# Altium PCB TP_PCB.PcbDoc
Units mm, origin at the board's own origin, x right, y up, seen from the top; angles counter-clockwise.
Board outline 41 x 58.5 mm, 2 copper layers (Top Layer, Bottom Layer); 36 components, 22 nets, 142 pads, 26 vias.
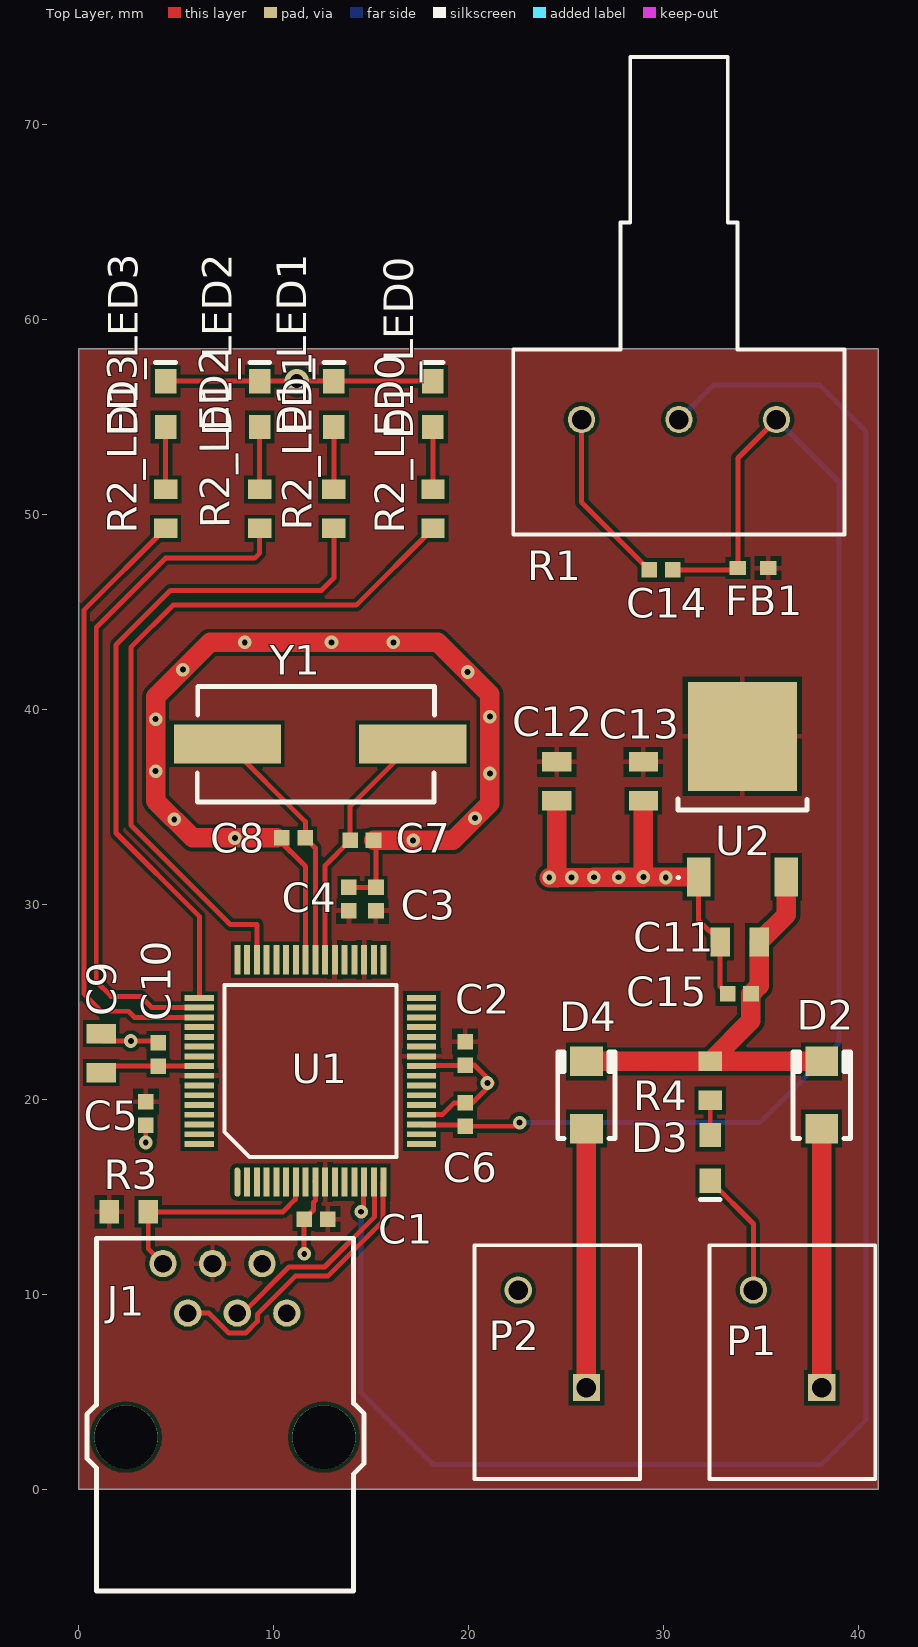
[diagram p0: Top Layer view]
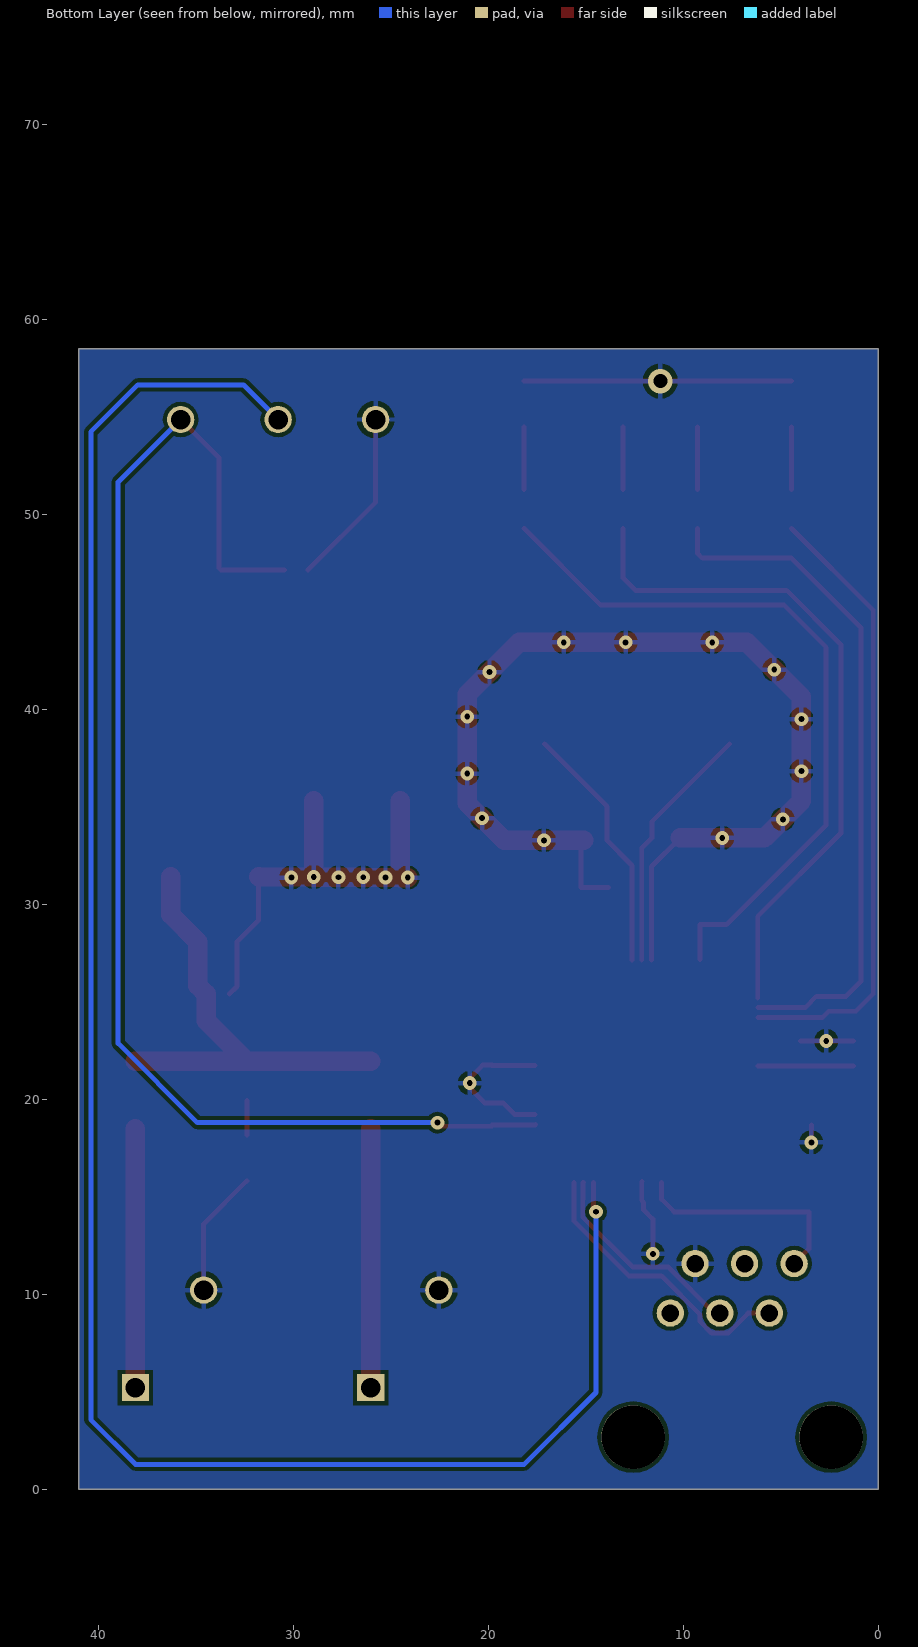
[diagram p1: Bottom Layer view, seen from below]

## Layer stack, top to bottom
Top Solder: solder mask 0.0102, Solder Resist, Dk 3.5
Top Layer: signal copper 0.0356
Dielectric 1: dielectric 0.32, FR-4, Dk 4.8
Bottom Layer: signal copper 0.0356
Bottom Solder: solder mask 0.0102, Solder Resist, Dk 3.5

## Board outline
0,0 41,0 41,58.5 0,58.5

## Design rules (kind name [scope] priority, off if disabled: settings)
Clearance [All] p1: gap=0.2
HoleSize [All] p1: absolutevalues=TRUE maxlimit=5 minlimit=0.3 maxpercent=80.000 minpercent=20.000
MinimumSolderMaskSliver [All] p1: minsoldermaskwidth=0.1
PolygonConnect [All] p1: connectstyle=Relief reliefconductorwidth=0.254 reliefentries=4 polygonreliefangle="90 Angle" airgapwidth=0.254
RoutingVias [All] p1: holewidth=0.3 width=0.7 viastyle="Through Hole" minholewidth=0.3 minwidth=0.7 maxholewidth=0.711 maxwidth=1
SilkToBoardRegionClearance SilkToBoardRegionClearance_1 [Not (InComponent('R1') OR InComponent('J1'))] p1:
SilkToBoardRegionClearance [All] p2 off:
SilkToSolderMaskClearance [IsPad] p1: minsilkscreentomaskgap=0.05 clearancetoexposedcopper=TRUE
SolderMaskExpansion [All] p1: expansion=0.102
UnpouredPolygon [All] p1: allowunpoured=FALSE
Width [All] p1: maxlimit=1 minlimit=0.2 preferedwidth=0.254 toplayer_prefwidth=0.2 bottomlayer_minwidth=0.254 bottomlayer_maxwidth=0.254 minimp=50.000000 maximp=50.000000 favimp=50.000000
25 further rules are at their usual default settings.

## Classes and differential pairs
component class LED0: D1_LED0 R2_LED0
component class LED1: D1_LED1 R2_LED1
component class LED2: D1_LED2 R2_LED2
component class LED3: D1_LED3 R2_LED3
component class PIC: C1 C2 C3 C4 C5 C6 C7 C8 C9 C10 J1 R3 U1 Y1
component class POWER: C11 C12 C13 C14 C15 D2 D3 D4 FB1 P1 P2 R4 U2
component class TP: R1
net class LED[0..3]: LED0 LED1 LED2 LED3
channel class led: LED0 LED1 LED2 LED3

## Components (designator, comment, footprint, x,y, rotation, side; value= is the part's Value field where it differs from the comment)
C1 "100nF" CAPC1608N 11.557,13.843 r0 top
C2 "100nF" CAPC1608N 19.812,21.748 r90 top
C3 "100nF" CAPC1608N 15.24,30.861 r270 top
C4 "100nF" CAPC1608N 13.843,30.861 r270 top
C5 "100nF" CAPC1608N 3.429,18.669 r90 top
C6 "100nF" CAPC1608N 19.812,19.812 r270 top
C7 "20pF" CAPC1608N 15.113,33.274 r180 top
C8 "20pF" CAPC1608N 10.414,33.401 r0 top
C9 "10uF" CAPC2012N 1.143,23.368 r270 top
C10 "1uF" CAPC1608N 4.064,22.898 r270 top
C11 "10uF" CAPC2012N 32.893,28.067 r0 top
C12 "10uF" CAPC2012N 24.511,35.306 r90 top
C13 "1uF" CAPC2012N 28.956,35.306 r90 top
C14 "100nF" CAPC1608N 29.254,47.148 r0 top
C15 "10uF" CAPC1608N 33.274,25.4 r0 top
D1_LED0 "Green LED" "LED 0805" 18.161,54.483 r90 top (schematic designator D1)
D1_LED1 "Green LED" "LED 0805" 13.081,54.483 r90 top (schematic designator D1)
D1_LED2 "Green LED" "LED 0805" 9.271,54.483 r90 top (schematic designator D1)
D1_LED3 "Green LED" "LED 0805" 4.445,54.483 r90 top (schematic designator D1)
D2 "GF1A" SMA/DO-214AC_21 38.1,18.489 r90 top
D3 "Green LED" "LED 0805" 32.385,18.161 r270 top
D4 "GF1A" SMA/DO-214AC_21 26.035,18.489 r90 top
FB1 "600r" INDC1608AN 35.35,47.244 r180 top
J1 "Program / Debug" RJ12_90 2.413,2.667 r0 top
P1 "12V Main" PHOENIX_1985195 34.6,5.207 r0 top
P2 "12V Battery" PHOENIX_1985195 22.535,5.207 r0 top
R1 "1K" PDB181-K415K-102A2 25.781,54.864 r0 top (schematic designator R2)
R2_LED0 "330r" RESC1608N 18.161,49.276 r90 top (schematic designator R2)
R2_LED1 "330r" RESC1608N 13.081,49.276 r90 top (schematic designator R2)
R2_LED2 "330r" RESC1608N 9.271,49.276 r90 top (schematic designator R2)
R2_LED3 "330r" RESC1608N 4.445,49.276 r90 top (schematic designator R2)
R3 "4.7K" RESC1608N 3.556,14.224 r180 top
R4 "470r" RESC1608N 32.385,19.939 r90 top
U1 "PIC32MX764F128H-I/PT" QFP50P1200X1200X120-64 8.128,15.748 r90 top
U2 "AP1117" TD03B_N 34.036,38.608 r0 top
Y1 "8MHz" "HC49/4H SMX CRYSTAL" 7.62,38.227 r0 top

## Footprints (in the part's own frame and the unit in brackets; to place one, negate y for a bottom-side part, rotate by r counter-clockwise, add the part's x,y. Pads: shape width x height; smd on the part's side, far side on the other; paste and mask are expansions set on the pad)
CAPC1608N [mm]
  rect 0.8x0.8 smd: 1(0,0) 2(1.2,0)
CAPC2012N [mm]
  rect 1x1.5 smd: 1(0,0) 2(2,0)
"HC49/4H SMX CRYSTAL" [mm]
  rect 5.5x2 smd: 1(0,0) 2(9.5,0)
  silkscreen extent -1.55,-2.97 10.62,2.95
INDC1608AN [mm]
  rect 0.85x0.7 smd: 1(0,0) 2(1.545,0)
"LED 0805" [mm]
  rect 1.25x1.1 smd: 1(0,0) 2(2.35,0)
  silkscreen extent 3.3,-0.51 3.3,0.51
PDB181-K415K-102A2 [mm]
  round 1.4 hole 1: 1(10,0) 2(0,0) 3(5,0)
  silkscreen extent -3.5,-5.9 13.5,18.6
PHOENIX_1985195 [mm]
  rect 1.4x1.4 hole 1: 1(3.5,0)
  round 1.4 hole 1: 2(0,5)
  silkscreen extent -2.25,-4.7 6.25,7.3
QFP50P1200X1200X120-64 [mm]
  oval 1.5x0.3 smd: 1(0,0)
  rect 1.5x0.3 smd: 2(0,-0.5) 3(0,-1) 4(0,-1.5) 5(0,-2) 6(0,-2.5) 7(0,-3) 8(0,-3.5) 9(0,-4) 10(0,-4.5) 11(0,-5) 12(0,-5.5) 13(0,-6) 14(0,-6.5) 15(0,-7) 16(0,-7.5) 33(11.4,-7.5) 34(11.4,-7) 35(11.4,-6.5) 36(11.4,-6) 37(11.4,-5.5) 38(11.4,-5) 39(11.4,-4.5) 40(11.4,-4) 41(11.4,-3.5) 42(11.4,-3) 43(11.4,-2.5) 44(11.4,-2) 45(11.4,-1.5) 46(11.4,-1) 47(11.4,-0.5) 48(11.4,0)
  rect 0.3x1.5 smd: 17(1.95,-9.45) 18(2.45,-9.45) 19(2.95,-9.45) 20(3.45,-9.45) 21(3.95,-9.45) 22(4.45,-9.45) 23(4.95,-9.45) 24(5.45,-9.45) 25(5.95,-9.45) 26(6.45,-9.45) 27(6.95,-9.45) 28(7.45,-9.45) 29(7.95,-9.45) 30(8.45,-9.45) 31(8.95,-9.45) 32(9.45,-9.45) 49(9.45,1.95) 50(8.95,1.95) 51(8.45,1.95) 52(7.95,1.95) 53(7.45,1.95) 54(6.95,1.95) 55(6.45,1.95) 56(5.95,1.95) 57(5.45,1.95) 58(4.95,1.95) 59(4.45,1.95) 60(3.95,1.95) 61(3.45,1.95) 62(2.95,1.95) 63(2.45,1.95) 64(1.95,1.95)
  silkscreen extent 1.28,-8.16 10.11,0.67
RESC1608N [mm]
  rect 1x1.2 smd: 1(0,0) 2(2,0)
RJ12_90 [mm]
  round 1.4 hole 0.9: 1(1.9,8.9) 2(4.44,8.9) 3(6.98,8.9) 4(3.17,6.36) 5(5.71,6.36) 6(8.25,6.36)
  round 3.25 hole 3.25 unplated: ""(0,0) ""(10.16,0)
  silkscreen extent -2.01,-7.9 12.22,10.2
SMA/DO-214AC_21 [mm]
  rect 1.52x1.68 smd: 1(0,0) 2(3.45,0)
  silkscreen extent -0.51,-1.47 3.94,1.47
TD03B_N [mm]
  rect 1.2x2 smd: 1(-2.25,-7.2) 3(2.25,-7.2)
  rect 5.6x5.6 smd: 4(0,0)
  silkscreen extent -3.3,-7.24 3.3,-3.2

## Part data
C1 C2 C3 C4 C5 C6 C7 C8 C9 C10 C11 C12 C13 C14 C15: library part Cap, "Capacitor"
D1_LED0 D1_LED1 D1_LED2 D1_LED3 D3: library part LED0, "Typical INFRARED GaAs LED"
D2 D4: library part Diode, "Default Diode"
FB1: library part Inductor, "Inductor"
J1: library part "Header 6", "Header, 6-Pin"
P1 P2: library part "Header 2", "Header, 2-Pin"
R1: library part RPot, "Potentiometer"
R2_LED0 R2_LED1 R2_LED2 R2_LED3 R3 R4: library part Res1, "Resistor"
U1: library part PIC32
Y1: library part XTAL, "Crystal Oscillator"

## Via types
v1: diameter 0.7, hole 0.3, Top Layer to Bottom Layer, 25 vias
v2: diameter 1.27, hole 0.711, Top Layer to Bottom Layer, 1 vias

## Nets (pads, with @x,y where several pads share a name; then routed paths per layer and width w, separated by ;. In a path a pad name is that pad's centre, name@x,y a point inside that pad or via, vN(x,y) a via of type N, cw(c..) or ccw(c..) an arc to the next point about the centre after c; other vN are vias at no path point)
ALIM: D2.1 P1.1 | length 13.3
  Top Layer w1: P1.1 D2.1
BATTERY: D4.1 P2.1 | length 13.3
  Top Layer w1: P2.1 D4.1
GND: C1.1 C2.1 C3.1 C4.1 C5.1 C6.1 C7.1 C8.1 C9.1 C10.1 C11.1 C12.1 C13.1 C14.1 C15.1 D1_LED0.2 D1_LED1.2 D1_LED2.2 D1_LED3.2 D3.2 J1.3 P1.2 P2.2 R1.2 U1.9 U1.20 U1.25 U1.41 U2.1 | length 126.8
  Top Layer w0.254: C9.1@1.27,22.987 v1(2.667,22.987) C10.1@3.975,22.987 ; v1(3.429,17.78) C5.1 ; D1_LED3.2 D1_LED2.2 D1_LED1.2 D1_LED0.2 ; C8.1@10.16,33.401 11.628,31.933 U1.41 ; v1(11.557,12.065) C1.1 12.03,14.316 12.03,14.697 12.128,14.795 U1.9 U1.9@12.105,15.771 ; C4.1 C3.1 C7.1@15.24,33.147 ; U1.20@17.601,19.221 18.655,19.221 19.246,19.812 C6.1 20.193,19.812 21.209,20.828 20.289,21.748 C2.1 19.812,21.721 U1.25@17.601,21.721 ; v1(24.13,31.369) 26.416,31.386 27.686,31.395 28.957,31.404 29.464,31.408 ; R1.2 25.781,50.621 C14.1 ; U2.1 31.786,29.174 C11.1 32.893,25.781 C15.1 ; D3.2 34.6,13.596 P1.2
  Top Layer w1: C8.1@10.16,33.401 v1(8.001,33.401) 5.842,33.401 3.937,35.306 3.937,40.64 6.731,43.434 18.415,43.434 21.082,40.767 21.082,35.179 19.177,33.274 v1(17.145,33.274) C7.1 ; v1(24.13,31.369) 24.513,31.371 v1(26.416,31.381) v1(27.686,31.387) v1(28.957,31.394) U2.1 ; 24.511,31.75 C12.1 ; v1@28.956,31.53 C13.1
  other v1: 20.955,20.828 25.273,31.369 30.099,31.369 4.889,34.353 20.32,34.417 21.082,36.703 3.937,36.83 3.937,39.497 21.082,39.624 19.939,41.91 5.334,42.037 8.509,43.434 12.954,43.434 16.129,43.434
  other v2: 11.176,56.833
LED0: R2_LED0.1 U1.46 | length 37.5
  Top Layer w0.254: U1.46@9.144,27.164 9.144,28.956 7.778,28.956 2.667,34.067 2.667,43.18 4.826,45.339 14.224,45.339 R2_LED0.1
LED1: R2_LED1.1 U1.49 | length 35
  Top Layer w0.254: U1.49 6.178,29.382 1.905,33.655 1.905,43.307 4.699,46.101 12.446,46.101 13.081,46.736 R2_LED1.1
LED2: R2_LED2.1 U1.50 | length 35.2
  Top Layer w0.254: U1.50 3.75,24.698 3.175,25.273 1.651,25.273 0.889,26.035 0.889,44.196 4.445,47.752 9.017,47.752 9.271,48.006 R2_LED2.1
LED3: R2_LED3.1 U1.51 | length 32
  Top Layer w0.254: R2_LED3.1 0.254,45.085 0.254,25.4 1.143,24.511 2.54,24.511 2.853,24.198 U1.51
MCLR: J1.1 R3.1 U1.7 | length 11.6
  Top Layer w0.254: J1.1 3.556,12.324 R3.1 10.466,14.224 11.105,14.863 U1.7@11.105,15.725
NetC9_2: C9.2 C10.2 U1.56 | length 4.9
  Top Layer w0.254: C9.2@1.27,21.698 C10.2 U1.56
NetD1_LED0_1: D1_LED0.1 R2_LED0.2 | length 3.2
  Top Layer w0.254: R2_LED0.2 D1_LED0.1
NetD1_LED1_1: D1_LED1.1 R2_LED1.2 | length 3.2
  Top Layer w0.254: R2_LED1.2 D1_LED1.1
NetD1_LED2_1: D1_LED2.1 R2_LED2.2 | length 3.2
  Top Layer w0.254: R2_LED2.2 D1_LED2.1
NetD1_LED3_1: D1_LED3.1 R2_LED3.2 | length 3.2
  Top Layer w0.254: R2_LED3.2 D1_LED3.1
NetD3_1: D3.1 R4.1 | length 1.8
  Top Layer w0.254: D3.1 R4.1
NetR1_3: R1.3 U1.14 | length 101.2
  Top Layer w0.254: v1(14.478,14.224) 14.605,14.351 U1.14@14.605,15.725
  Bottom Layer w0.254: v1(14.478,14.224) 14.478,4.953 18.161,1.27 38.1,1.27 40.386,3.556 40.386,54.229 37.973,56.642 32.559,56.642 R1.3
PGC: J1.5 U1.15 | length 10.9
  Top Layer w0.254: J1.5 8.407,9.027 10.768,11.388 12.599,11.388 15.155,13.944 15.155,14.859 15.151,14.863 15.151,15.725 U1.15@15.105,15.725
PGD: J1.4 U1.16 | length 15
  Top Layer w0.254: J1.4 6.671,9.027 7.698,8 8.548,8 9.15,8.602 9.15,8.966 11.118,10.934 12.787,10.934 15.609,13.756 15.609,15.725 U1.16@15.605,15.725
V3P3: C1.2 C2.2 C3.2 C4.2 C5.2 C12.2 C13.2 FB1.1 J1.2 R3.2 U1.10 U1.26 U1.35 U1.38 U1.57 U2.4
V3P3A: C6.2 C14.2 FB1.2 R1.1 U1.19 | length 68
  Top Layer w0.254: U1.19 17.601,18.675 19.812,18.675 C6.2 v1@22.422,18.612 ; C14.2 FB1.2@33.709,47.148 ; FB1.2 33.805,52.888 R1.1
  Bottom Layer w0.254: v1(22.606,18.796) 34.925,18.796 38.989,22.86 38.989,51.656 R1.1
V5: C11.2 C15.2 D2.2 D4.2 R4.2 U2.3 | length 23.1
  Top Layer w1: D4.2 R4.2 ; U2.3 36.286,29.46 C11.2 34.893,25.819 C15.2 34.474,24.028 R4.2 ; D2.2 R4.2
X1: C7.2 U1.39 Y1.2 | length 12.9
  Top Layer w0.254: U1.39 12.628,31.989 C7.2 13.913,35.02 Y1.2
X2: C8.2 U1.40 Y1.1 | length 12.9
  Top Layer w0.254: Y1.1 11.614,34.233 C8.2 12.128,32.887 U1.40
pads on no net: J1. J1.6 U1.1 U1.2 U1.3 U1.4 U1.5 U1.6 U1.8 U1.11 U1.12 U1.13 U1.17 U1.18 U1.21 U1.22 U1.23 U1.24 U1.27 U1.28 U1.29 U1.30 U1.31 U1.32 U1.33 U1.34 U1.36 U1.37 U1.42 U1.43 U1.44 U1.45 U1.47 U1.48 U1.52 U1.53 U1.54 U1.55 U1.58 U1.59 U1.60 U1.61 U1.62 U1.63 U1.64

## Polygon pours and split planes (outlines as drawn)
GND on Bottom Layer "Bottom-GND" (solid, remove dead copper, pour order 2): 0,58.5 41,58.5 41,0 0,0
V3P3 on Top Layer "Pour-V3P3" (solid, pour order 3): 0,0 41,0 41,58.5 0,58.5

## Silkscreen, mask and mechanical layers (free items; w line width, h text height)
Drill Drawing:
  lines w0.025: 47.327,27.444 48.6,27.444 48.6,28.717 47.327,28.717 47.327,27.444 ; 47.327,32.536 48.6,32.536 47.964,31.263 47.327,32.536 ; 47.327,35.082 47.327,35.4 47.645,35.718 47.327,36.036 47.327,36.354 47.645,36.354 47.964,36.036 48.282,36.354 48.6,36.354 48.6,36.036 48.282,35.718 48.6,35.4 48.6,35.082 48.282,35.082 47.964,35.4 47.645,35.082 47.327,35.082 ; 47.327,39.537 47.964,38.9 48.6,39.537 47.964,40.173 47.327,39.537 ; 47.327,43.038 47.645,43.038 47.645,42.719 48.282,42.719 48.282,43.038 48.6,43.038 48.6,43.674 48.282,43.674 48.282,43.992 47.645,43.992 47.645,43.674 47.327,43.674 47.327,43.038
  lines w0.381: 45.593,26.298 144.341,26.298 ; 45.593,45.393 144.341,45.393 ; 59.616,22.479 59.616,49.212 ; 77.38,22.479 77.38,49.212 ; 111.637,22.479 111.637,49.212 ; 124.515,22.479 124.515,49.212 ; 45.593,22.479 144.341,22.479 144.341,49.212 45.593,49.212 45.593,22.479
  text "Symbol" at 47.884,46.538 h1.83
  text "Hit Count" at 60.762,46.538 h1.83
  text "Finished Hole Size" at 78.526,46.538 h1.83
  text "Plated" at 112.783,46.538 h1.83
  text "Hole Type" at 125.66,46.538 h1.83
  text "1" at 60.762,42.719 h1.53
  text "0.711mm (28.00mil)" at 78.526,42.719 h1.53
  text "PTH" at 112.783,42.719 h1.53
  text "Round" at 125.66,42.719 h1.53
  text "2" at 60.762,38.9 h1.53
  text "3.250mm (127.95mil)" at 78.526,38.9 h1.53
  text "NPTH" at 112.783,38.9 h1.53
  text "Round" at 125.66,38.9 h1.53
  text "6" at 60.762,35.082 h1.53
  text "0.900mm (35.43mil)" at 78.526,35.082 h1.53
  text "PTH" at 112.783,35.082 h1.53
  text "Round" at 125.66,35.082 h1.53
  text "7" at 60.762,31.263 h1.53
  text "1.000mm (39.37mil)" at 78.526,31.263 h1.53
  text "PTH" at 112.783,31.263 h1.53
  text "Round" at 125.66,31.263 h1.53
  text "25" at 60.762,27.444 h1.53
  text "0.300mm (11.81mil)" at 78.526,27.444 h1.53
  text "PTH" at 112.783,27.444 h1.53
  text "Round" at 125.66,27.444 h1.53
  text "41 Total" at 60.762,23.625 h1.53
Board Outline:
  the board outline again, w0.2

## Dimensions
0,0 to 41,0 on Mechanical 16
0,58.5 to 0,0 on Mechanical 16